# Allegro board USB_UART_RS485.brd
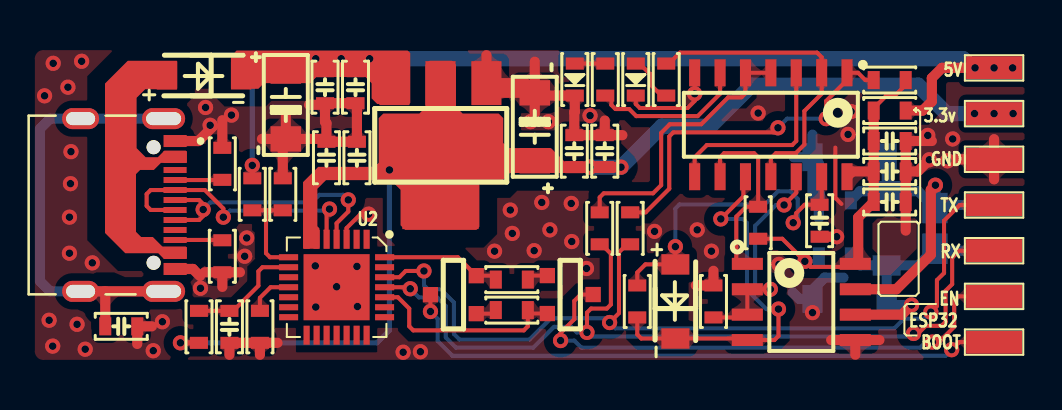
[diagram p0: board, top side]
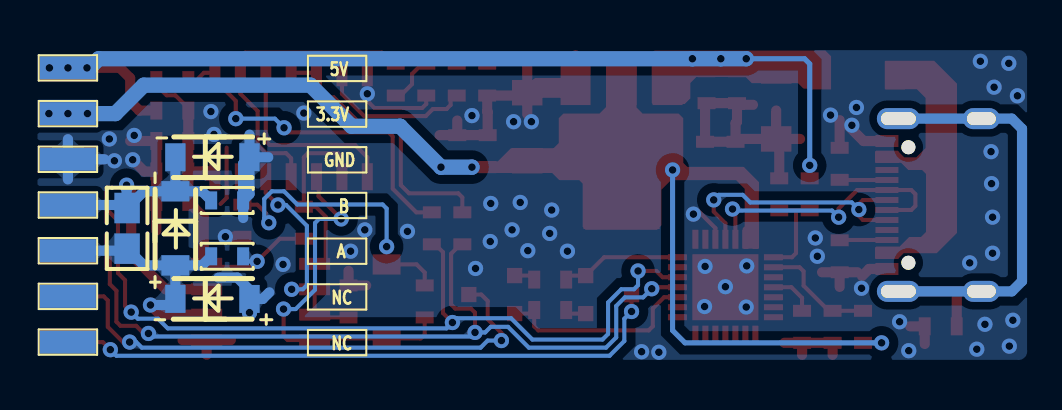
[diagram p1: board, bottom side, seen from below]

No outline. copper layers: TOP, BOTTOM. Coordinates in mm from the lowest, leftmost part position.

## Design rules (mm)
constraint set DEFAULT: min track width 0.203

## Placement (name value [footprint] x y rotation side)
C1  0.1uF  [C0603]  12.22 12.75 270 top
C2  1uF  [C0603]  13.75 12.75 270 top
C3  0.1uF  [C0603]  24.69 9.55 90 top
C4  1uF  [C0603]  26.21 9.55 90 top
C5  1uF  [C0603]  13.82 9.22 90 top
C6  0.1uF  [C0603]  12.29 9.22 90 top
C7  0.1uF  [C0603]  2.03 0.79 0 top
C8  0.1uF  [C0603]  7.44 0.76 270 top
C9  0.1uF  [C0603]  40.46 10.06 0 top
C10  0.1uF  [C0603]  40.46 8.54 0 top
C11  1uF  [C0603]  40.46 7.01 0 top
C12  33pF  [C0603]  36.96 6.07 270 top
C14  10uF  [C1206]  10.26 13.56 270 top
C15  10uF  [C1206]  22.71 9.07 90 top
D1  1N4148  [SOD_123]  6.17 13.34 0 top
D2  1N4148  [SOD_123]  40.31 5.69 90 bottom
D3  1N4148  [SOD_123]  38.46 9.25 0 bottom
D4  1N4148  [SOD_123]  38.46 2.16 0 bottom
D5  1N4148  [SOD_123]  29.74 2.03 270 top
D6  0603  [D0603]  24.71 13.13 270 top
D7  0603  [D0603]  27.76 13.13 270 top
J1  TYPE C  [TYPE-C-16P]  0 6.86 270 top
Q1  MMBT2222  [SOT_23]  23.34 3.33 270 top
Q2  MMBT2222  [SOT_23]  19.79 1.42 90 top
R1  10K  [R0603]  21.56 3.13 0 top
R2  10K  [R0603]  21.56 1.6 0 top
R3  5.1K  [R0603]  7.09 8.92 90 top
R4  5.1K  [R0603]  7.09 4.29 270 top
R5  10K  [R0603]  8.59 7.39 270 top
R6  10K  [R0603]  8.97 0.76 90 top
R7  10K  [R0603]  10.11 7.39 90 top
R8  1K  [R0603]  5.92 0.76 270 top
R9  120  [R0805]  42.72 5.69 180 bottom
R10  10K  [R0603]  33.88 5.97 90 top
R11  10K  [R0603]  37.72 4.29 0 bottom
R12  10K  [R0603]  31.65 2.03 90 top
R13  10K  [R0603]  37.72 7.09 180 bottom
R14  10K  [R0603]  40.46 13.11 180 top
R15  56K  [R0603]  27.84 2.03 270 top
R16  2.2K  [R0603]  26.24 13.13 90 top
R17  2.2K  [R0603]  29.29 13.13 270 top
R18  0  [R0603]  25.96 5.69 90 top
R19  0  [R0603]  27.48 5.69 90 top
R20  0  [R0603]  40.46 11.58 180 top
T2  Test_Point_Pwr  [TEST_POINT_PAD_45X110]  45.68 2.29 90 top
T3  Test_Point_Pwr  [TEST_POINT_PAD_45X110]  45.68 0 90 top
T4  Test_Point_Pwr  [TEST_POINT_PAD_45X110]  45.68 4.57 90 top
T5  Test_Point_Pwr  [TEST_POINT_PAD_45X110]  45.68 6.86 90 top
T6  Test_Point_Pwr  [TEST_POINT_PAD_45X110]  45.68 9.14 90 top
T7  Test_Point_Pwr  [TEST_POINT_PAD_45X110]  45.68 11.43 90 top
T8  Test_Point_Pwr  [TEST_POINT_PAD_45X110]  45.68 13.72 90 top
T9  Test_Point_Pwr  [TEST_POINT_PAD_45X110]  45.68 6.86 90 bottom
T10  Test_Point_Pwr  [TEST_POINT_PAD_45X110]  45.68 4.57 90 bottom
T11  Test_Point_Pwr  [TEST_POINT_PAD_45X110]  45.68 0 90 bottom
T12  Test_Point_Pwr  [TEST_POINT_PAD_45X110]  45.68 2.29 90 bottom
T13  Test_Point_Pwr  [TEST_POINT_PAD_45X110]  45.68 9.14 90 bottom
T14  Test_Point_Pwr  [TEST_POINT_PAD_45X110]  45.68 11.43 90 bottom
T15  Test_Point_Pwr  [TEST_POINT_PAD_45X110]  45.68 13.72 90 bottom
U1  AMS1117-3V3  [SOT_223_3]  20.29 12.96 180 top
U2  CP2102  [QFN28_5X5]  12.8 2.74 270 top
U3  SN75176B  [SOIC8]  36.04 2.01 0 top
U4  74HC04D  [SOIC_14]  34.52 10.87 270 top

## Library data of the parts
C1-C12 = NPOL_CAP: User Part Number: ***
C14 C15 = NPOL_CAP
D1-D5 = DIODE
D6 D7 = LED: User Part Number: ***
J1 = TYPE_C_0
Q1 Q2 = BJT_NPN
R1-R8 R10-R20 = RES: User Part Number: ***
R9 = RES
T2-T15 = TestPoint
U1 = LM1117X_4P
U2 = CP2102_QFN28_0
U3 = SN65176_2
U4 = 74HC04

## Footprints (pads in the part's own frame, mm; a bottom-side part is the same pattern mirrored in y, then rotated)
C0603
  rect 0.599x0.899 smd: 1(-0.8,0) 2(0.8,0)
C1206
  rect 1.27x1.524 smd: 1(0,0) 2(3.4,0)
D0603
  rect 0.599x0.899 smd: 1(-0.8,0) 2(0.8,0)
QFN28_5X5
  rect 0.95x0.305 smd: 1(-2.4,1.5) 2(-2.4,1) 3(-2.4,0.5) 4(-2.4,0) 5(-2.4,-0.5) 6(-2.4,-1) 7(-2.4,-1.5) 15(2.4,-1.5) 16(2.4,-1) 17(2.4,-0.5) 18(2.4,0) 19(2.4,0.5) 20(2.4,1) 21(2.4,1.5)
  rect 0.305x0.95 smd: 8(-1.5,-2.4) 9(-1,-2.4) 10(-0.5,-2.4) 11(0,-2.4) 12(0.5,-2.4) 13(1,-2.4) 14(1.5,-2.4) 22(1.5,2.4) 23(1,2.4) 24(0.5,2.4) 25(0,2.4) 26(-0.5,2.4) 27(-1,2.4) 28(-1.5,2.4)
  rect 3.302x3.302 smd: 29(0,0)
R0603
  rect 0.599x0.899 smd: 1(-0.8,0) 2(0.8,0)
R0805
  rect 1.27x1.524 smd: 1(0,1.016) 2(0,-1.016)
SOD_123
  rect 1.016x1.397 smd: 1(-1.854,0) 2(1.854,0)
SOIC8
  rect 1.549x0.599 smd: 1(-2.7,1.905) 2(-2.7,0.635) 3(-2.7,-0.635) 4(-2.7,-1.905) 5(2.7,-1.905) 6(2.7,-0.635) 7(2.7,0.635) 8(2.7,1.905)
SOIC_14
  rect 1.349x0.551 smd: 1(-2.6,3.81) 2(-2.6,2.54) 3(-2.6,1.27) 4(-2.6,0) 5(-2.6,-1.27) 6(-2.6,-2.54) 7(-2.6,-3.81) 8(2.6,-3.81) 9(2.6,-2.54) 10(2.6,-1.27) 11(2.6,0) 12(2.6,1.27) 13(2.6,2.54) 14(2.6,3.81)
SOT_23
  rect 0.762x0.762 smd: 1(0,0) 2(1.9,0) 3(0.95,2.291)
SOT_223_3
  rect 1.5x2.2 smd: 1(0,0) 2(2.3,0) 3(4.6,0)
  rect 3.81x2.007 smd: 4(2.3,6.3)
TEST_POINT_PAD_45X110
  rect 1.143x2.794 smd: 1(0,0)
TYPE-C-16P
  round 0.7 hole 0.7 unplated: (-2.89,3.65) (2.89,3.65)
  rect 0.6x1.15 smd: A1_B12(-3.2,4.725) A4_B9(-2.4,4.725) A9_B4(2.4,4.725) A12_B1(3.2,4.725)
  rect 0.3x1.15 smd: A5(-1.25,4.725) A6(-0.25,4.725) A7(0.25,4.725) A8(1.25,4.725) B5(1.75,4.725) B6(0.75,4.725) B7(-0.75,4.725) B8(-1.75,4.725)
  oval 1.05x1.85 hole 0.65x1.45: SH1(-4.32,0) SH2(4.32,0)
  oval 1.05x2.15 hole 0.65x1.75: SH3(-4.32,4.15) SH4(4.32,4.15)

## Nets
+3.3V: C3.1 C4.1 C5.1 C6.1 C15.1 R8.2 T7.1(T) T14.1(T) U1.2 U1.4(OUT_PAD) U2.6(VDD) U2.7
+5V: C1.1 C2.1 C14.1 D1.2(CATHODE) R5.1 R20.1 T8.1(T) T15.1(T) U1.3
+5V_RS485: C9.1 C10.1 C11.1 R10.1 R11.1 R14.1 R20.2 U3.8(VCC) U4.14
GND: C1.2 C2.2 C3.2 C4.2 C5.2 C6.2 C7.2 C8.2 C9.2 C10.2 C11.2 C12.2 C14.2 C15.2 D3.1 D4.1 D6.2(CATHODE) D7.2(CATHODE) J1.A1_B12 J1.A12_B1 R3.2 R4.2 R6.1 R7.2 R12.2 R13.2 T6.1(T) T13.1(T) U1.1 U2.3 U2.29 U3.5 U4.7
VBUS: D1.1 J1.A4_B9 J1.A9_B4(VBUS#A9_B4)
A: D2.1 D4.2(CATHODE) R9.2 R11.2 T10.1(T) U3.6
B: D2.2(CATHODE) D3.2(CATHODE) R9.1 R13.1 T9.1(T) U3.7
D+: J1.A6 J1.B6 U2.4
D-: J1.A7 J1.B7 U2.5
DTR: Q2.2 R1.1 U2.28
EN: Q1.3(E) T2.1(T)
IO0_BOOT: Q2.3(E) T3.1(T)
RST: Q1.2 R2.2 U2.24
RX: R18.1 T4.1(T) U2.25
RX_RS485: R14.2 R19.2 U4.1
TX: R19.1 T5.1(T) U2.26
TX_RS485: R18.2 U4.4 U4.5
N15928036: Q1.1 R1.2
N15928128: C7.1 J1.SH1 J1.SH2 J1.SH3 J1.SH4
N15928236: J1.A5 R3.1
N15928260: Q2.1 R2.1
N15928274: J1.B5 R4.1
N15928376: R5.2 R7.1 U2.8
N15928380: C8.1 R8.1 U2.9
N15928384: R6.2 U2.11
N15930144: R10.2 U3.1 U4.9
N15930256: D5.2(CATHODE) R15.2 U3.4 U4.10
N15930268: C12.1 D5.1 R15.1 U4.13
N15930276: R12.1 U3.2 U3.3 U4.12(Y)
N15930438: U4.3 U4.8
N15930606: R16.1 U4.6
N15930676: R17.1 U4.2 U4.11
N159307201: D6.1 R16.2
N159307361: D7.1 R17.2

Pads without a net: J1 A8 B8; T11 1; T12 1; U2 1 2 10 12 13 14 15 16 17 18 19 20 21 22 23 27

## Via types
v1: diameter 0.762, hole 0.381, TOP to BOTTOM, 94 vias

## Routing (per net, layer and track width the routed paths; a pad name or vN(x,y) marks a point on that pad's centre or on a via; arc(x,y) is an arc through that point)
+3.3V: length 43.7
  TOP w0.254: R8.2 v1(4.99,-0.04)
  TOP w0.508: v1(25.48,8.75) C4.1 v1(27.03,8.75)
  BOTTOM w0.254: v1(15.44,8.61) 15.44,0.59 14.82,-0.04 v1(4.99,-0.04)
  BOTTOM w0.762: v1(25.48,8.75) v1(27.03,8.75) 29.07,10.8 31.5,10.8 33.55,12.85 41.88,12.85 43.31,11.43 v1(45.68,11.43)
  vias: v1(44.7,11.43) v1(46.63,11.43)
+5V: length 51.7
  TOP w0.254: R5.1 v1(8.59,8.84) ; D1.2 8.89,13.34
  TOP w0.508: R20.1 42.11,11.58 42.57,12.04 42.57,13.21 43.08,13.72 v1(44.73,13.72)
  TOP w0.762: v1(14.45,14.17) v1(13.03,14.17) v1(11.76,14.17)
  BOTTOM w0.254: v1(8.59,8.84) 8.59,13.92 8.84,14.17 v1(11.76,14.17)
  BOTTOM w0.762: v1(11.76,14.17) v1(13.03,14.17) v1(14.45,14.17) 44.15,14.17 44.6,13.72 v1(45.68,13.72)
  vias: v1(46.61,13.72)
+5V_RS485: length 18.2
  TOP w0.203: R10.1 35.09,5.17 v1(36.22,4.04) 36.5,3.76 38.59,3.76 U3.8 ; R14.1 41.26,12.87 40.74,12.35 40.31,12.35 39.66,11.7 R20.2
  TOP w0.508: C10.1 38.59,8.54 U4.14 ; C10.1 C9.1 R20.2 ; C10.1 C11.1 38.89,6.24 38.89,4.06 U3.8
  BOTTOM w0.203: v1(36.22,4.04) 36.66,4.04 R11.1
GND: length 85.5
  TOP w0.203: 37.74,9.73 37.74,7.21 38.05,6.91 ; D7.2 27.76,11.91 27.97,11.71 30.35,11.71 30.71,12.07 v1(30.71,12.42) U4.7 ; 14.15,6.55 13.3,5.7 U2.3
  TOP w0.508: C6.2 12.29,10.95 12.22,11.02 C1.2 ; C6.2 C5.2 13.82,11.88 C2.2 C1.2 ; C6.2 12.15,10.16 C14.2 ; C15.2 22.85,12.33 D6.2 24.71,11.53 24.69,11.51 C3.2 C4.2 ; C15.2 20.78,12.47 U1.1 ; C15.2 22.23,12.96 U1.1 ; C15.2 22.71,11.4 ; C15.2 22.71,14.03 ; C1.2 12.14,11.87 11.42,11.87 ; R4.2 6.21,3.49 ; R4.2 7.97,3.49 ; R4.2 7.09,2.76 ; R6.1 9.85,-0.04 ; R6.1 8.97,-0.63 ; R6.1 C8.2 7.44,-0.63 ; T6.1 43.85,9.14 ; T6.1 45.68,8.14 ; T6.1 45.68,10.15 ; C14.2 9.07,10.16 ; C14.2 10.26,11.58 ; C14.2 10.11,10.01 R7.2 ; 2.83,-0.09 C7.2 3.56,0.79 ; 42.57,10.06 C9.2 C10.2 ; U3.5 39.95,0.1 ; U3.5 37.54,0.1 ; U3.5 38.74,-0.63 ; 6.63,10.8 5.89,10.06 J1.A1_B12 ; C4.2 27.09,10.35 ; C4.2 26.21,11.08 ; U1.1 20.29,14.35 ; C10.2 41.86,8.54 v1(42.44,9.12) ; C10.2 C11.2 41.26,5.58 ; 30.77,2.83 R12.2 31.65,3.56 ; 5.97,3.3 5.61,3.66 J1.A12_B1 ; R3.2 7.09,11.1 ; C12.2 v1(37.81,5.27)
  BOTTOM w0.508: T6.1 43.85,9.14 ; T6.1 45.68,10.15 ; T6.1 45.68,8.14 ; D3.1 35.66,9.25 ; D3.1 36.6,7.41 R13.2 ; D3.1 36.92,8.93 R13.2 ; D3.1 36.6,10.38 ; R13.2 36.92,6.21 ; 35.61,2.49 35.94,2.16 D4.1 ; 38.15,3.23 37.21,3.23 36.6,2.62 D4.1 ; D4.1 v1(36.6,1.47)
  vias: v1(-1.8,12.32) v1(-1.57,1.09) v1(-1.37,13.95) v1(-1.4,-0.2) v1(-0.63,12.75) v1(-0.56,6.25) v1(-0.56,4.45) v1(-0.48,9.53) v1(-0.51,7.93) v1(-0.18,0.89) v1(0.05,14.05) v1(0.23,-0.35) v1(0.58,3.96) v1(3.63,-0.43) v1(4.09,1.02) v1(5.99,2.69) v1(6.25,11.74) v1(6.48,10.85) v1(7.54,11.35) v1(8.2,4.29) v1(8.31,5.21) v1(11.73,3.81) v1(11.76,1.75) v1(12.8,2.77) v1(13.82,3.79) v1(13.84,1.78) v1(14.4,6.4) v1(16.13,-0.51) v1(16.99,-0.48) v1(20.7,4.55) v1(21.49,6.61) v1(21.59,5.44) v1(22.5,11.02) v1(22.68,4.57) v1(23.06,6.99) v1(23.39,11.02) v1(23.47,5.61) v1(24.54,6.94) v1(24.56,5.03) v1(25.3,3.68) v1(25.48,11.33) v1(28.7,5.54) v1(30.84,5.61) v1(31.55,4.55) v1(33.88,11.46) v1(34.93,3.89) v1(38.38,10.39) v1(38.53,11.53) v1(42.37,10.34) v1(43.36,9.07) v1(43.61,10.16)
A: length 13.8
  TOP w0.508: v1(41.55,1.86) 41.07,1.37 U3.6
  BOTTOM w0.508: v1(41.55,1.86) 40.61,1.86 D4.2 D2.1 ; T10.1 42.83,4.57 R9.2 41.88,3.84 D2.1 ; D2.1 38.98,3.84 R11.2
B: length 18.6
  TOP w0.508: U3.7 40.79,2.64 42.52,4.37 42.52,7.62 v1(42.75,7.85)
  BOTTOM w0.508: D3.2 D2.2 ; D2.2 41.88,7.54 R9.1 42.75,6.73 ; D2.2 38.98,7.54 R13.1 ; T9.1 42.87,6.86 42.75,6.73 ; 42.75,6.73 v1(42.75,7.85)
D+: length 13.4
  TOP w0.203: J1.A6 5.93,7.11 6.13,6.9 v1(6.13,6.63) 6.13,6.31 5.93,6.11 J1.B6 ; U2.4 12.8,5.94 13.39,6.53 v1(13.39,7.11)
  BOTTOM w0.203: v1(13.39,7.11) 13.13,7.37 11.94,7.37 11.56,6.99 6.48,6.99 v1(6.13,6.63)
D-: length 13.9
  TOP w0.203: v1(7.14,6.25) 7.14,6.68 6.21,7.61 J1.B7 3.51,7.61 3.3,7.4 3.3,6.81 3.51,6.61 J1.A7 ; v1(12.45,6.66) 12.3,6.51 U2.5
  BOTTOM w0.203: v1(7.14,6.25) 7.47,6.58 12.37,6.58 v1(12.45,6.66)
DTR: length 6
  TOP w0.203: U2.28 18.87,4.24 Q2.2 20.57,3.32 R1.1
EN: length 27
  TOP w0.203: Q1.3 25.01,2.38 24.69,2.06 24.69,1.14 24,0.46 v1(24,0.08) ; v1(42.6,0) 42.93,0 43.69,0.76 43.69,2.08 43.89,2.29 T2.1
  BOTTOM w0.203: v1(24,0.08) 24.69,0.08 25.04,-0.28 41.99,-0.28 42.27,0 v1(42.6,0)
IO0_BOOT: length 30.9
  TOP w0.203: T3.1 43.94,0 v1(43.56,-0.38) ; Q2.3 v1(17.5,1.53)
  BOTTOM w0.203: v1(17.5,1.53) 17.86,1.17 17.86,0.05 18.59,-0.68 43.26,-0.68 v1(43.56,-0.38)
RST: length 10.3
  TOP w0.203: Q1.2 22.54,1.43 R2.2 22.36,0.79 22.16,0.59 16.64,0.59 16.43,0.79 16.43,1.68 15.87,2.24 U2.24
RX: length 42.4
  TOP w0.203: T4.1 43.94,4.57 43.59,4.22 43.59,2.9 43.26,2.57 43.26,1.02 43.05,0.81 42.27,0.81 41.88,0.43 v1(41.66,0.43) ; v1(25.32,0.48) 25.32,1.47 25.53,1.68 26.31,1.68 26.52,1.88 26.52,4.42 26.05,4.89 R18.1 ; v1(16.48,2.67) 16.41,2.74 U2.25
  BOTTOM w0.203: v1(41.66,0.43) 41.55,0.43 41.4,0.28 25.53,0.28 v1(25.32,0.48) 24.82,0.48 24.54,0.76 23.67,0.76 22.63,-0.28 18.77,-0.28 18.26,0.23 18.26,1.8 17.83,2.24 16.92,2.24 v1(16.48,2.67)
RX_RS485: length 17.5
  TOP w0.203: R19.2 28.26,6.49 29.44,7.67 29.44,10.29 29.64,10.49 34.65,10.49 v1(34.87,10.72) ; v1(37.29,11.18) 37.29,12.07 38.33,13.11 U4.1 38.88,13.47 39.24,13.11 R14.2
  BOTTOM w0.203: v1(37.29,11.18) 35.33,11.18 v1(34.87,10.72)
TX: length 43.3
  TOP w0.203: R19.1 27.32,4.89 26.92,4.5 26.92,1.45 v1(26.45,0.98) ; U2.26 15.94,3.24 16.26,3.56 v1(17.17,3.56) ; v1(42.52,1.5) 42.82,1.8 42.82,3.1 43.18,3.46 43.18,6.07 43.97,6.86 T5.1
  BOTTOM w0.203: v1(42.52,1.5) 42.19,1.17 41.17,1.17 40.69,0.69 26.75,0.69 v1(26.45,0.98) 26.24,1.19 23.52,1.19 22.45,0.13 18.95,0.13 18.67,0.41 18.67,1.98 18.01,2.64 17.37,2.64 17.17,2.85 v1(17.17,3.56)
TX_RS485: length 14
  TOP w0.203: U4.4 U4.5 33.25,12.45 33.05,12.24 32.39,12.24 31.04,10.9 29.46,10.9 29.03,10.47 29.03,7.85 28.63,7.44 26.16,7.44 25.96,7.24 R18.2
N15928036: length 1.1
  TOP w0.203: Q1.1 22.57,3.33 R1.2
N15928128: length 26.3
  TOP w0.508: 1.23,2.54 J1.SH4 ; 1.23,2.54 C7.1 ; 1.23,2.54 J1.SH2
  BOTTOM w0.508: J1.SH3 J1.SH1 -1.52,11.18 -2.03,10.67 -2.03,3.05 -1.52,2.54 J1.SH2 J1.SH4
N15928236: length 2.4
  TOP w0.203: J1.A5 7.08,8.11 R3.1
N15928260: length 1.1
  TOP w0.203: Q2.1 20.59,1.42 R2.1
N15928274: length 2.4
  TOP w0.203: R4.1 7.07,5.11 J1.B5
N15928376: length 4.9
  TOP w0.203: U2.8 9.47,4.24 9.27,4.45 9.27,6.59 ; 9.27,6.59 R5.2 ; 9.27,6.59 R7.1
N15928380: length 5.8
  TOP w0.203: U2.9 9.09,3.74 8.89,3.54 8.89,2.82 7.63,1.56 C8.1 R8.1
N15928384: length 2.3
  TOP w0.203: U2.11 9.5,2.74 8.97,2.21 R6.2
N15930144: length 9.6
  TOP w0.203: U4.9 31.98,9.25 32.18,9.45 33.68,9.45 33.88,9.25 R10.2 33.29,6.77 32.79,6.27 32.79,4.12 32.99,3.91 U3.1
N15930256: length 18.8
  TOP w0.203: U4.10 33.15,8.17 33.15,7.29 v1(32.02,6.16) ; R15.2 27.84,0.38 28.04,0.18 D5.2 33.27,0.18 U3.4 34.7,0.1 34.9,0.31 v1(34.9,1.65)
  BOTTOM w0.203: v1(34.9,1.65) 34.29,1.65 33.32,2.62 33.32,5.96 33.12,6.16 v1(32.02,6.16)
N15930268: length 16.8
  TOP w0.203: v1(29.74,4.78) D5.1 28.24,3.89 27.84,3.48 R15.1 ; U4.13 37.06,6.97 C12.1 36.21,6.87 35.79,6.45 35.79,6.12 v1(35.64,5.97)
  BOTTOM w0.203: v1(29.74,4.78) 29.74,6.68 29.95,6.88 34.21,6.88 34.87,7.54 35.48,7.54 35.86,7.16 35.86,6.2 v1(35.64,5.97)
N15930276: length 11.5
  TOP w0.203: v1(35.18,6.86) 35.79,7.47 U4.12 ; R12.1 33.2,1.23 U3.3 U3.2 v1(34.49,2.64)
  BOTTOM w0.203: v1(34.49,2.64) 33.93,2.64 33.73,2.85 33.73,5.82 34.77,6.86 v1(35.18,6.86)
N15930438: length 9.8
  TOP w0.203: U4.3 35.79,10.06 35.59,9.86 31.32,9.86 30.71,9.25 U4.8
N15930606: length 7.8
  TOP w0.203: U4.6 31.98,12.42 30.86,11.3 27.79,11.3 27.43,11.66 26.75,11.66 26.54,11.86 26.54,12.13 26.34,12.33 R16.1
N15930676: length 15.7
  TOP w0.203: R17.1 29.43,13.93 29.97,14.48 36.83,14.48 37.06,14.25 U4.2 37.06,12.42 36.2,11.56 36.2,9.88 35.76,9.45 34.77,9.45 34.52,9.2 U4.11
N159307201: length 1.5
  TOP w0.203: D6.1 R16.2
N159307361: length 2.5
  TOP w0.203: D7.1 27.95,13.93 28.47,13.41 28.47,12.9 29.04,12.33 R17.2

## Copper pours and planes (outline as drawn; the poured copper is in the pictures)
+3.3V on TOP (solid shape): 18.77,13.87 18.77,11.76 19.1,11.43 20.9,11.43 21.13,11.2 21.13,9.96 21.39,9.7 23.52,9.7 24.18,9.04 26.67,9.04 26.82,8.89 26.82,8.59 26.7,8.46 21.46,8.46 21.11,8.1 20.12,8.1 19.94,7.93 19.94,5.77 19.79,5.61 16.23,5.61 16,5.84 16,7.62 15.52,8.1 12.27,8.1 11.84,7.67 11.84,5.79 11.94,5.69 11.94,4.73 11.89,4.67 11.15,4.67 11.13,4.7 11.13,8 11.89,8.76 14.71,8.76 14.91,8.97 14.91,11.2 15.14,11.43 16.94,11.43 17.25,11.74 17.25,13.87 17.45,14.07 18.57,14.07
+5V on TOP (solid shape): 16.48,14.45 16.48,11.96 16.43,11.91 14.83,11.91 14.55,12.19 14.55,12.96 14.25,13.26 11.79,13.26 11.48,12.96 9.17,12.96 8.89,12.68 7.57,12.68 7.52,12.73 7.52,14.3 7.8,14.58 16.36,14.58
GND on TOP: -1.78,-0.89 -2.16,-0.77 -2.29,-0.38 -2.29,14.1 -2.16,14.48 -1.78,14.6 46.7,14.6 47.08,14.48 47.21,14.1 47.21,-0.38 47.08,-0.77 46.7,-0.89 ; 7 cut-outs
GND on BOTTOM: -1.78,-0.89 -2.16,-0.77 -2.29,-0.38 -2.29,14.1 -2.16,14.48 -1.78,14.6 46.7,14.6 47.08,14.48 47.21,14.1 47.21,-0.38 47.08,-0.77 46.7,-0.89 ; 5 cut-outs
VBUS on TOP (solid shape): 4.83,14.05 4.83,12.7 4.78,12.65 3.23,12.65 2.79,12.22 2.79,9.7 3.25,9.25 3.86,9.25 4.19,9.58 5.26,9.58 5.31,9.53 5.31,8.99 5.28,8.97 4.01,8.97 3.66,8.61 2.97,8.61 2.77,8.41 2.77,5.51 3.02,5.26 3.61,5.26 4.09,4.78 5.26,4.78 5.31,4.73 5.31,4.19 5.28,4.17 4.17,4.17 3.89,4.45 2.24,4.45 1.22,5.46 1.22,12.93 2.36,14.07 4.8,14.07

Small or netless copper shapes (teardrops, artwork), in the pictures only: 184 on TOP, 52 on BOTTOM

## Text on the board
Ref Des/Silkscreen Bottom: B | A | NC | 5V | GND | 3.3V
Ref Des/Silkscreen Top: ESP32 | BOOT | 3.3v | GND | EN | TX | RX | 5V
User.7: FIGURE | FINISHED_SIZE | 15.0 | 20.0 | 23.598 | 32.0 | 42.0 | 52.0 | 54.0 | 82.677 | 27.559 | 57.087x25.591 | 68.898x25.591 | 118.0x39.0 | 138.0x39.0 | DRILL CHART: TOP to BOTTOM | ALL UNITS ARE IN MILS | PLATED | NON-PLATED | QTY | 462 | 15 | 2 | 4 | 3 | 16 | 12 | 1
